# Altium PCB KeyboardMoudle.PcbDoc
Units mm, origin at the board's own origin, x right, y up, seen from the top; angles counter-clockwise.
Board outline 191 x 97 mm, 2 copper layers (Top Layer, Bottom Layer); 309 components, 178 nets, 843 pads, 193 vias.
Unrouted connection lines stored in the file: 648.
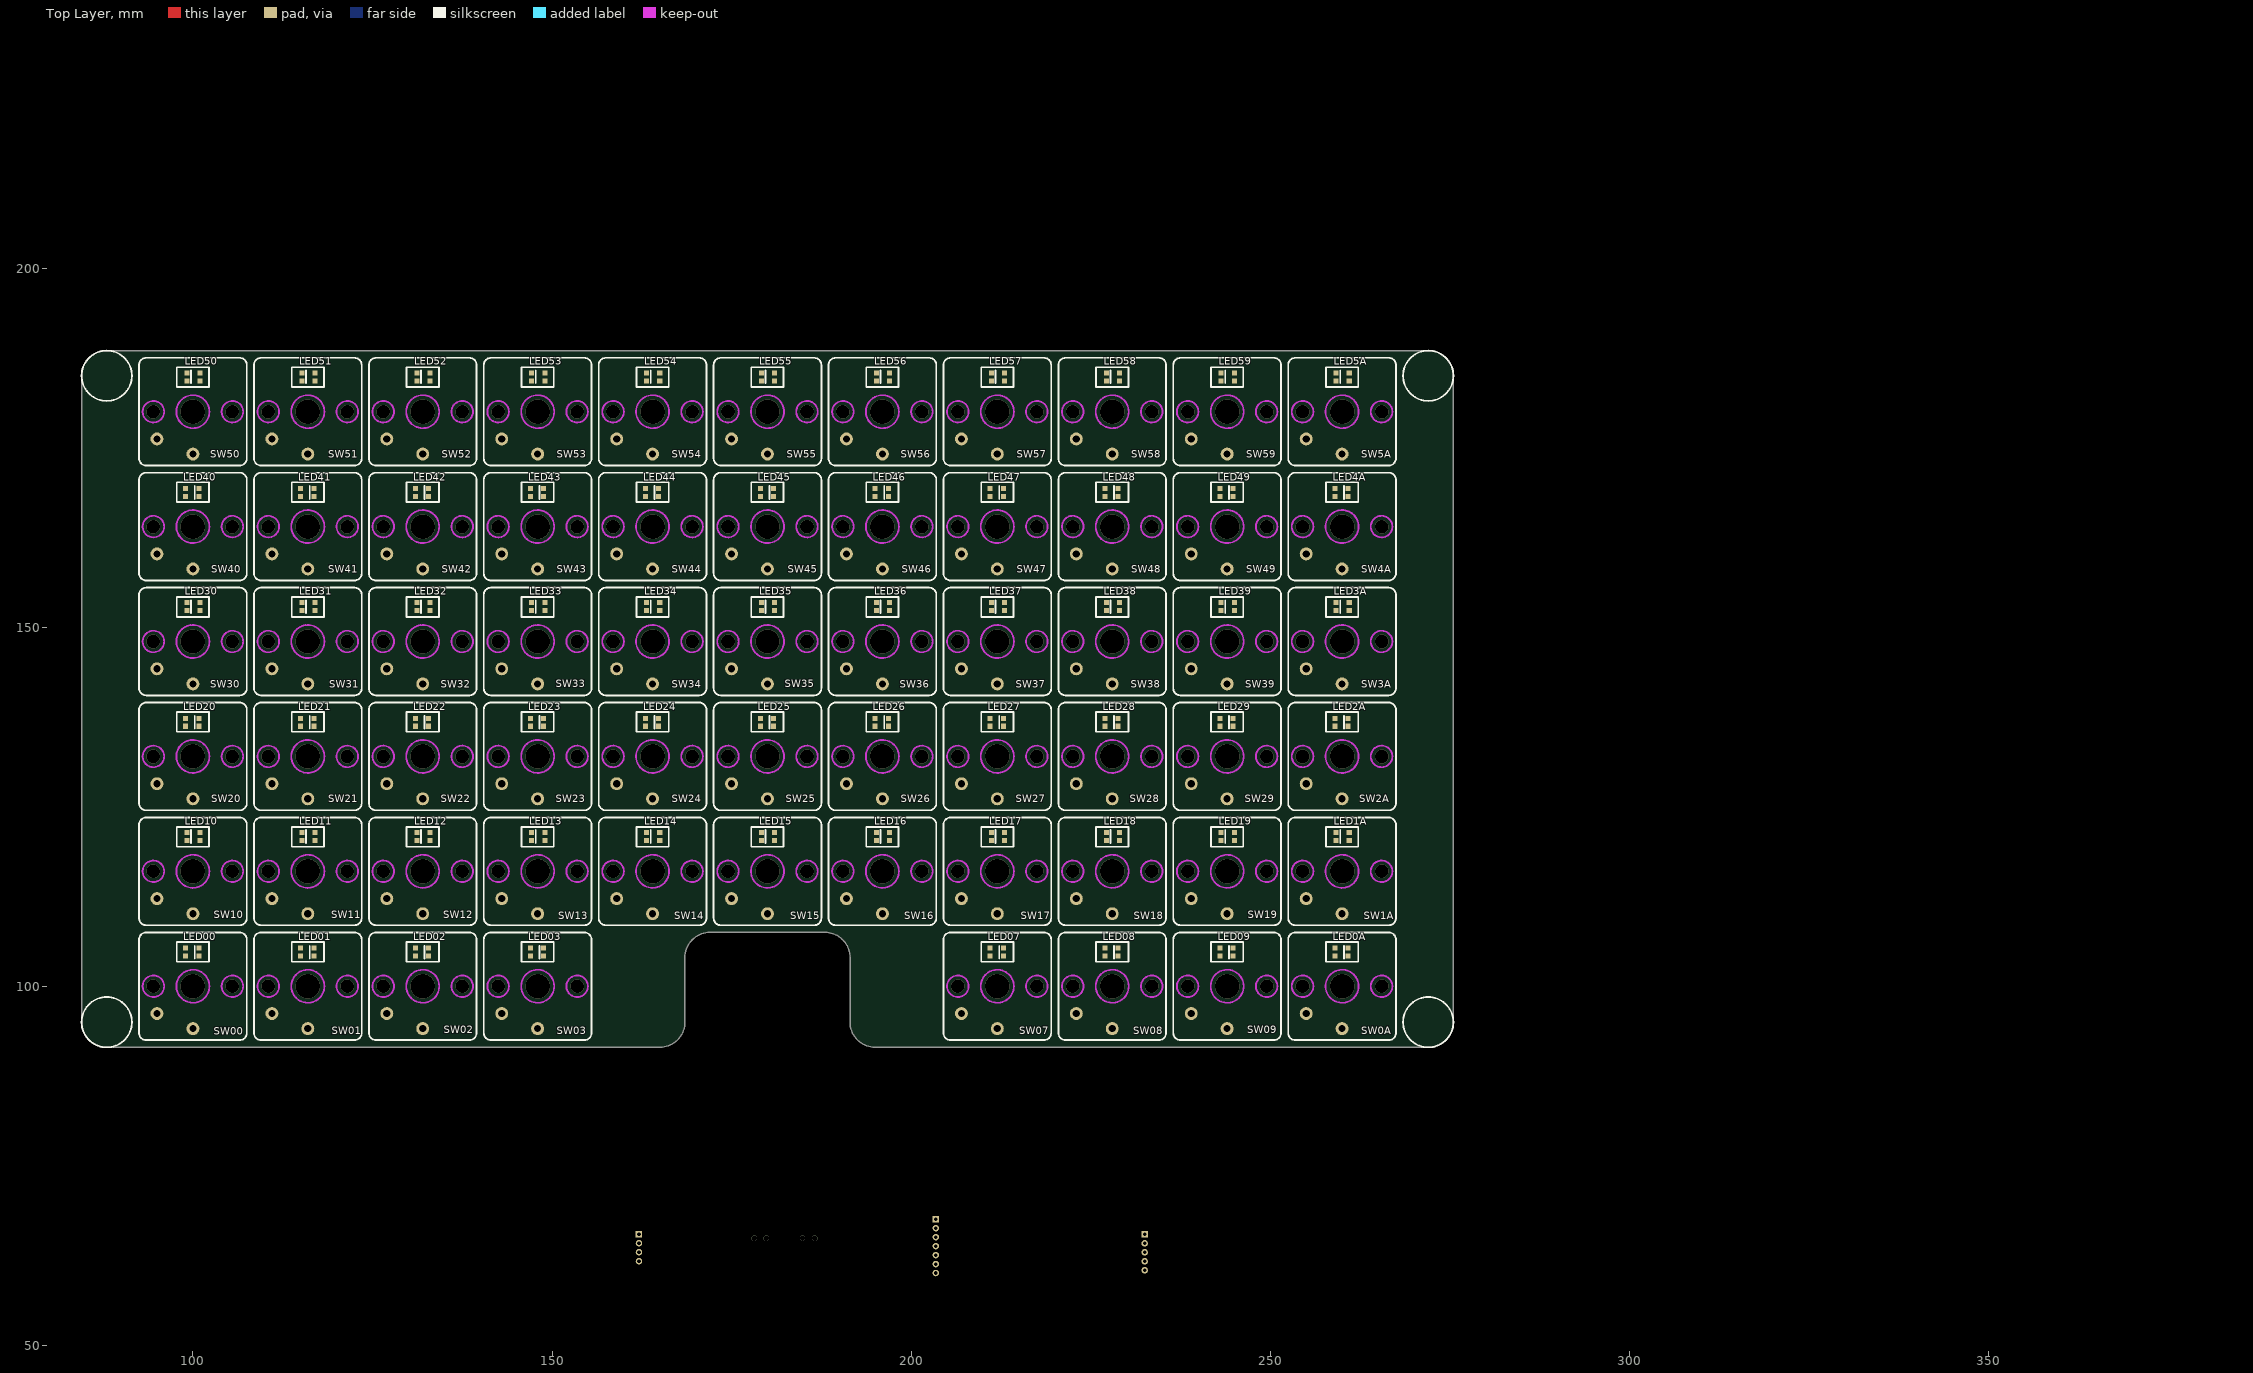
[diagram p0: Top Layer view]
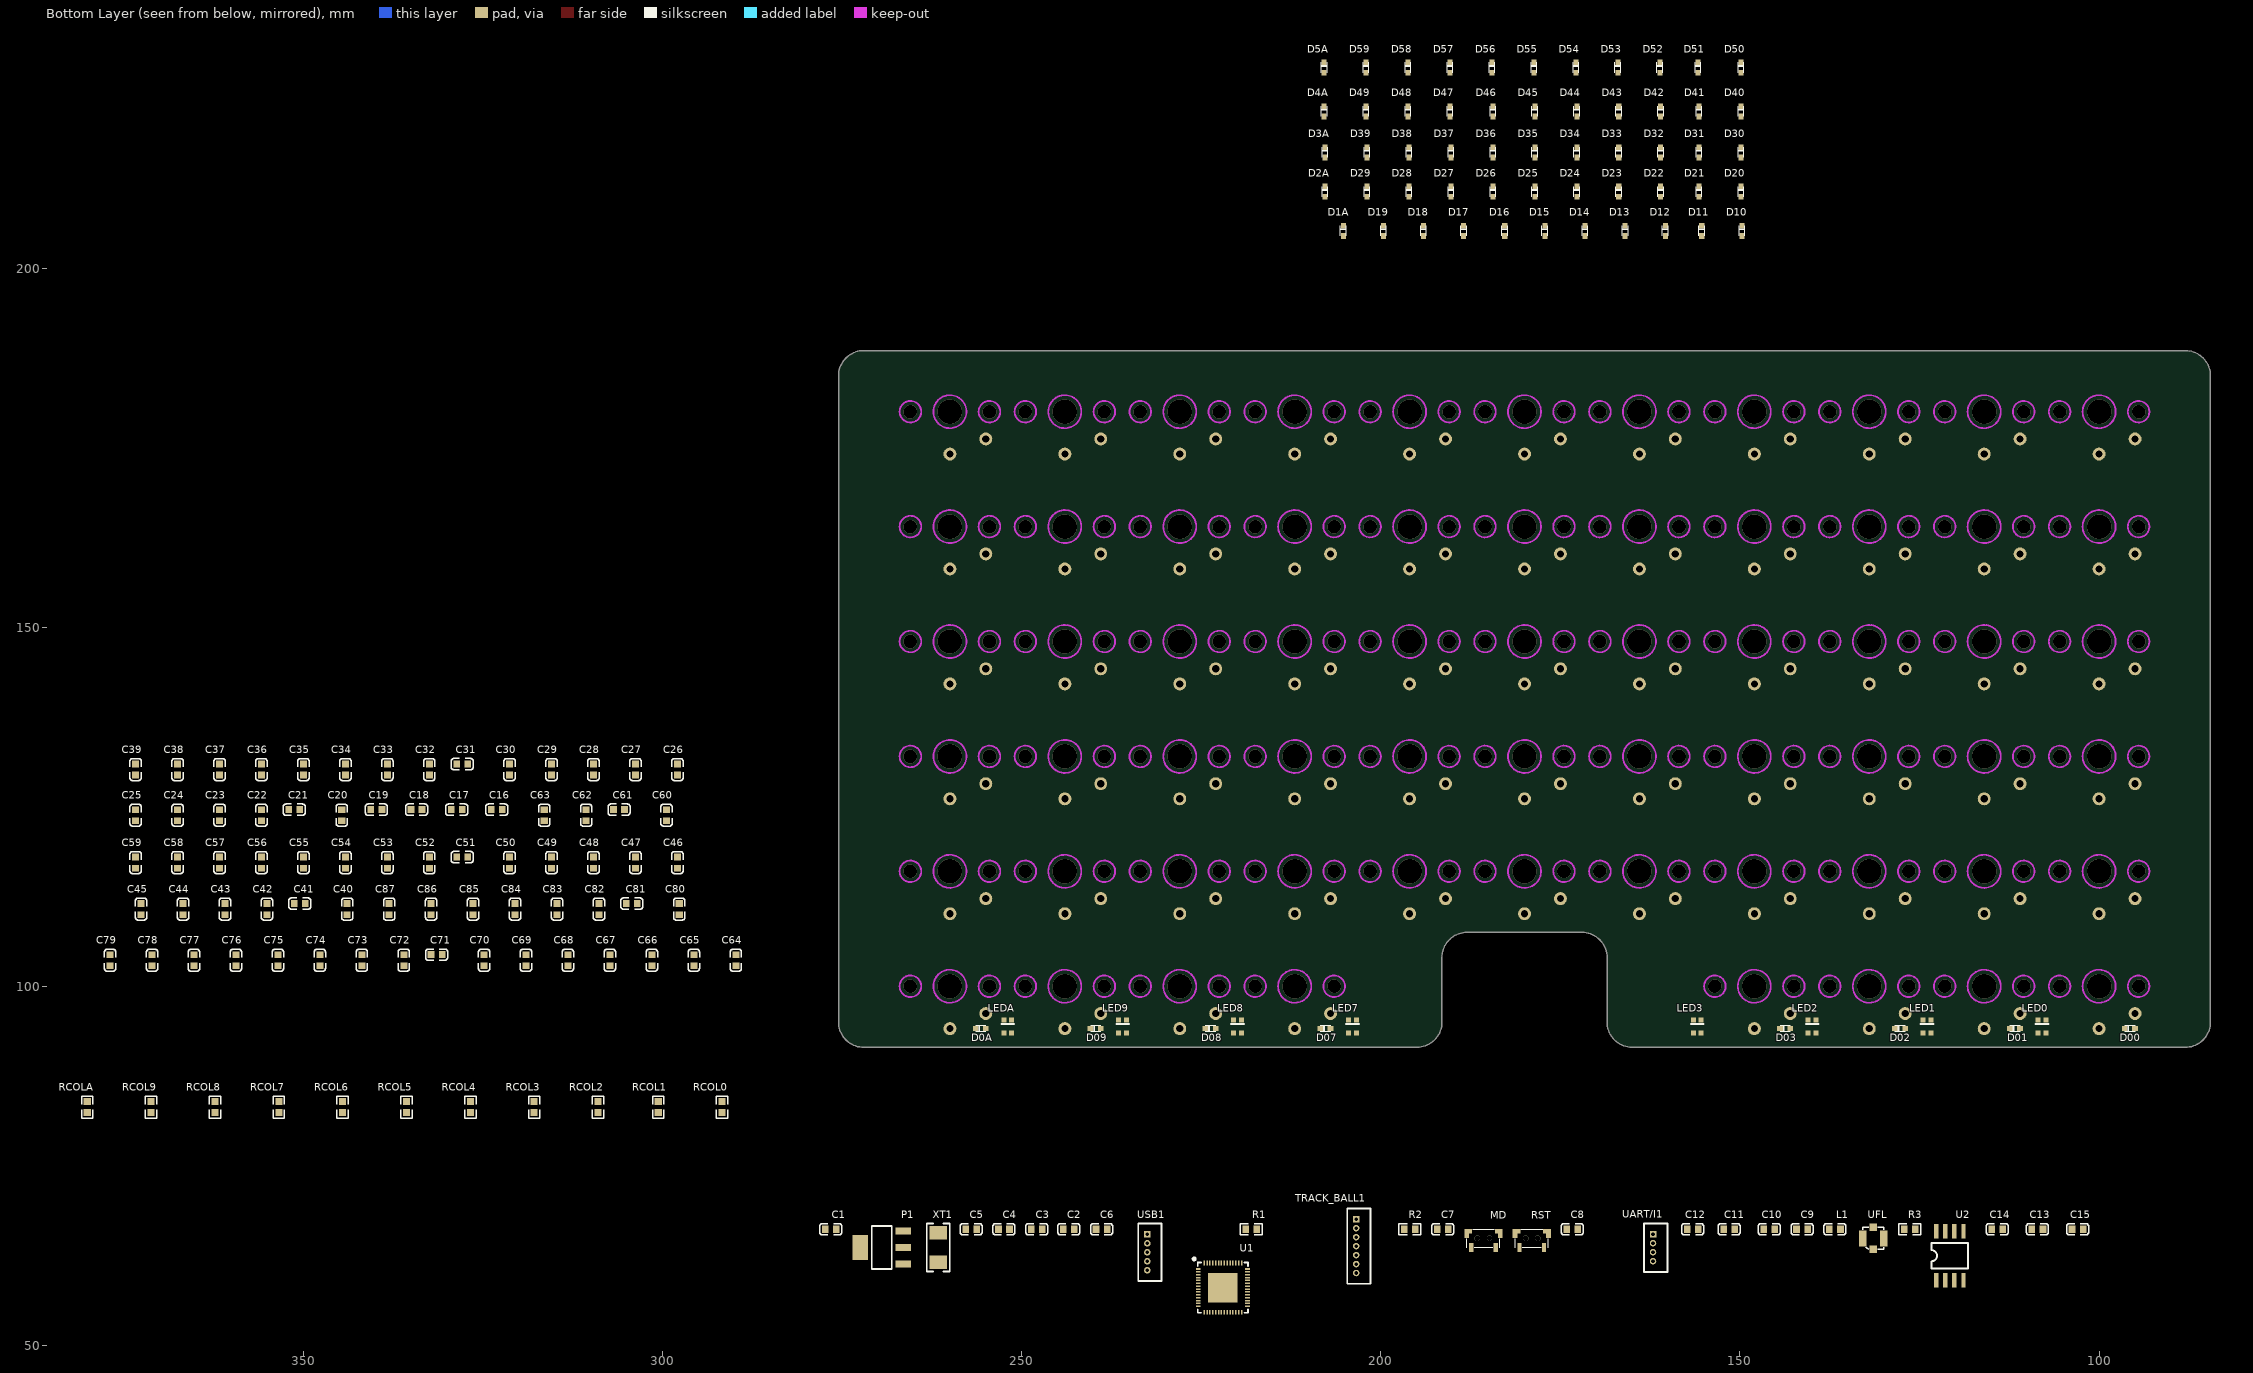
[diagram p1: Bottom Layer view, seen from below]

## Layer stack, top to bottom
Top Solder: solder mask 0.0102, Solder Resist, Dk 3.5
Top Layer: signal copper 0.0356
Dielectric 1: dielectric 0.32, FR-4, Dk 4.8
Bottom Layer: signal copper 0.0356
Bottom Solder: solder mask 0.0102, Solder Resist, Dk 3.5

## Board outline
88,91.5 165,91.5 ccw(c165,95) 168.5,95 168.5,104 cw(c172,104) 172,107.5 188,107.5 cw(c188,104) 191.5,104 191.5,95 ccw(c195,95) 195,91.5 272,91.5 ccw(c272,95) 275.5,95 275.5,185 ccw(c272,185) 272,188.5 268.5,188.5 88,188.5 ccw(c88,185) 84.5,185 84.5,95 ccw(c88,95)

## Design rules (kind name [scope] priority, off if disabled: settings)
Clearance [All] p1: gap=0.152 ignorepadtopadclearanceinfootprint=FALSE
HoleSize [All] p1: absolutevalues=TRUE maxlimit=7.62 minlimit=0.025 maxpercent=80.000 minpercent=20.000
MinimumSolderMaskSliver [All] p1: minsoldermaskwidth=0.152
PolygonConnect [All] p1: connectstyle=Relief reliefconductorwidth=0.254 reliefentries=4 polygonreliefangle="90 Angle" airgapwidth=0.254
RoutingVias [All] p1: holewidth=0.305 width=0.508 viastyle="Through Hole" minholewidth=0.305 minwidth=0.508 maxholewidth=4.572 maxwidth=4.572
SilkToSilkClearance [All] p1 off: silktosilkclearance=0.254
SilkToSolderMaskClearance [IsPad] p1 off: minsilkscreentomaskgap=0.254 clearancetoexposedcopper=TRUE
SolderMaskExpansion [All] p1: expansion=0.102 istentingtop=FALSE
Width [All] p1: maxlimit=1.27 minlimit=0.152 preferedwidth=0.254
26 further rules are at their usual default settings.

## Classes and differential pairs
component class KeyboardMoudle1: C1 C2 C3 C4 C5 C6 C7 C8 C9 C10 C11 C12 C13 C14 C15 FLT1 L1 MD P1 R1 R2 R3 RST TRACK_BALL1 U1 U2 UART/I1 UFL UFL1 USB1 XT1
component class KeyboardMoudle3: C16 C17 C18 C19 C20 C21 C22 C23 C24 C25 C26 C27 C28 C29 C30 C31 C32 C33 C34 C35 C36 C37 C38 C39 C40 C41 C42 C43 C44 C45 C46 C47 C48 C49 C50 C51 C52 C53 C54 C55 C56 C57 C58 C59 C60 C61 C62 C63 C64 C65 C66 C67 C68 C69 C70 C71 C72 C73 C74 C75 C76 C77 C78 C79 C80 C81 C82 C83 C84 C85 C86 C87 LED0 LED00 LED0A LED1 LED01 LED1A LED02 LED2 LED2A LED3 LED03 LED3A LED4A LED5A LED7 LED07 LED8 LED08 LED9 LED09 LED10 LED11 LED12 LED13 LED14 LED15 LED16 LED17 LED18 LED19 LED20 LED21 LED22 LED23 LED24 LED25 LED26 LED27 LED28 LED29 LED30 LED31 LED32 LED33 LED34 LED35 LED36 LED37 LED38 LED39 LED40 LED41 LED42 LED43 LED44 LED45 LED46 LED47 LED48 LED49 LED50 LED51 LED52 LED53 LED54 LED55 LED56 LED57 LED58 LED59 LEDA
component class KeyboardMoudle2: D00 D0A D01 D1A D02 D2A D03 D3A D4A D5A D07 D08 D09 D10 D11 D12 D13 D14 D15 D16 D17 D18 D19 D20 D21 D22 D23 D24 D25 D26 D27 D28 D29 D30 D31 D32 D33 D34 D35 D36 D37 D38 D39 D40 D41 D42 D43 D44 D45 D46 D47 D48 D49 D50 D51 D52 D53 D54 D55 D56 D57 D58 D59 RCOL0 RCOL1 RCOL2 RCOL3 RCOL4 RCOL5 RCOL6 RCOL7 RCOL8 RCOL9 RCOLA SW00 SW0A SW01 SW1A SW02 SW2A SW03 SW3A SW4A SW5A SW07 SW08 SW09 SW10 SW11 SW12 SW13 SW14 SW15 SW16 SW17 SW18 SW19 SW20 SW21 SW22 SW23 SW24 SW25 SW26 SW27 SW28 SW29 SW30 SW31 SW32 SW33 SW34 SW35 SW36 SW37 SW38 SW39 SW40 SW41 SW42 SW43 SW44 SW45 SW46 SW47 SW48 SW49 SW50 SW51 SW52 SW53 SW54 SW55 SW56 SW57 SW58 SW59

## Components (designator, comment, footprint, x,y, rotation, side; value= is the part's Value field where it differs from the comment)
C1 "22pF" 0603 276.606,66.167 r180 bottom
C2 "10uF" 0603 243.459,66.167 r180 bottom
C3 "104" 0603 247.904,66.167 r180 bottom
C4 "104" 0603 252.476,66.167 r180 bottom
C5 "10uF" 0603 257.048,66.167 r180 bottom
C6 "22pF" 0603 238.887,66.167 r180 bottom
C7 "1uF" 0603 191.389,66.167 r180 bottom
C8 "1uF" 0603 173.355,66.167 r180 bottom
C9 "104" 0603 141.351,66.167 r180 bottom
C10 "104" 0603 145.923,66.167 r180 bottom
C11 "104" 0603 151.511,66.167 r180 bottom
C12 "104" 0603 156.591,66.167 r180 bottom
C13 "3pF" 0603 108.585,66.167 r180 bottom
C14 "3pF" 0603 114.173,66.167 r180 bottom
C15 "104" 0603 102.997,66.167 r180 bottom
C16 "104" 0603 323.088,124.587 r180 bottom
C17 "104" 0603 328.676,124.587 r180 bottom
C18 "104" 0603 334.264,124.587 r180 bottom
C19 "104" 0603 339.852,124.587 r180 bottom
C20 "104" 0603 344.678,123.825 r90 bottom
C21 "104" 0603 351.282,124.587 r180 bottom
C22 "104" 0603 355.854,123.825 r90 bottom
C23 "104" 0603 361.696,123.825 r90 bottom
C24 "104" 0603 367.538,123.825 r90 bottom
C25 "104" 0603 373.38,123.825 r90 bottom
C26 "104" 0603 297.942,130.175 r90 bottom
C27 "104" 0603 303.784,130.175 r90 bottom
C28 "104" 0603 309.626,130.175 r90 bottom
C29 "104" 0603 315.468,130.175 r90 bottom
C30 "104" 0603 321.31,130.175 r90 bottom
C31 "104" 0603 327.914,130.937 r180 bottom
C32 "104" 0603 332.486,130.175 r90 bottom
C33 "104" 0603 338.328,130.175 r90 bottom
C34 "104" 0603 344.17,130.175 r90 bottom
C35 "104" 0603 350.012,130.175 r90 bottom
C36 "104" 0603 355.854,130.175 r90 bottom
C37 "104" 0603 361.696,130.175 r90 bottom
C38 "104" 0603 367.538,130.175 r90 bottom
C39 "104" 0603 373.38,130.175 r90 bottom
C40 "104" 0603 343.916,110.744 r90 bottom
C41 "104" 0603 350.52,111.506 r180 bottom
C42 "104" 0603 355.092,110.744 r90 bottom
C43 "104" 0603 360.934,110.744 r90 bottom
C44 "104" 0603 366.776,110.744 r90 bottom
C45 "104" 0603 372.618,110.744 r90 bottom
C46 "104" 0603 297.942,117.221 r90 bottom
C47 "104" 0603 303.784,117.221 r90 bottom
C48 "104" 0603 309.626,117.221 r90 bottom
C49 "104" 0603 315.468,117.221 r90 bottom
C50 "104" 0603 321.31,117.221 r90 bottom
C51 "104" 0603 327.914,117.983 r180 bottom
C52 "104" 0603 332.486,117.221 r90 bottom
C53 "104" 0603 338.328,117.221 r90 bottom
C54 "104" 0603 344.17,117.221 r90 bottom
C55 "104" 0603 350.012,117.221 r90 bottom
C56 "104" 0603 355.854,117.221 r90 bottom
C57 "104" 0603 361.696,117.221 r90 bottom
C58 "104" 0603 367.538,117.221 r90 bottom
C59 "104" 0603 373.38,117.221 r90 bottom
C60 "104" 0603 299.466,123.825 r90 bottom
C61 "104" 0603 306.07,124.587 r180 bottom
C62 "104" 0603 310.642,123.825 r90 bottom
C63 "104" 0603 316.484,123.825 r90 bottom
C64 "104" 0603 289.814,103.632 r90 bottom
C65 "104" 0603 295.656,103.632 r90 bottom
C66 "104" 0603 301.498,103.632 r90 bottom
C67 "104" 0603 307.34,103.632 r90 bottom
C68 "104" 0603 313.182,103.632 r90 bottom
C69 "104" 0603 319.024,103.632 r90 bottom
C70 "104" 0603 324.866,103.632 r90 bottom
C71 "104" 0603 331.47,104.394 r180 bottom
C72 "104" 0603 336.042,103.632 r90 bottom
C73 "104" 0603 341.884,103.632 r90 bottom
C74 "104" 0603 347.726,103.632 r90 bottom
C75 "104" 0603 353.568,103.632 r90 bottom
C76 "104" 0603 359.41,103.632 r90 bottom
C77 "104" 0603 365.252,103.632 r90 bottom
C78 "104" 0603 371.094,103.632 r90 bottom
C79 "104" 0603 376.936,103.632 r90 bottom
C80 "104" 0603 297.688,110.744 r90 bottom
C81 "104" 0603 304.292,111.506 r180 bottom
C82 "104" 0603 308.864,110.744 r90 bottom
C83 "104" 0603 314.706,110.744 r90 bottom
C84 "104" 0603 320.548,110.744 r90 bottom
C85 "104" 0603 326.39,110.744 r90 bottom
C86 "104" 0603 332.232,110.744 r90 bottom
C87 "104" 0603 338.074,110.744 r90 bottom
D00 "1N4148" SOD523 95,94.1 r0 bottom
D0A "1N4148" SOD523 255,94.1 r0 bottom
D01 "1N4148" SOD523 111,94.1 r0 bottom
D1A "1N4148" SOD523 205.232,204.47 r90 bottom
D02 "1N4148" SOD523 127,94.1 r0 bottom
D2A "1N4148" SOD523 207.772,209.931 r90 bottom
D03 "1N4148" SOD523 143,94.1 r0 bottom
D3A "1N4148" SOD523 207.772,215.392 r90 bottom
D4A "1N4148" SOD523 207.899,221.107 r90 bottom
D5A "1N4148" SOD523 207.899,227.203 r90 bottom
D07 "1N4148" SOD523 207,94.1 r0 bottom
D08 "1N4148" SOD523 223,94.1 r0 bottom
D09 "1N4148" SOD523 239,94.1 r0 bottom
D10 "1N4148" SOD523 149.733,204.47 r90 bottom
D11 "1N4148" SOD523 155.321,204.47 r90 bottom
D12 "1N4148" SOD523 160.401,204.47 r90 bottom
D13 "1N4148" SOD523 165.989,204.47 r90 bottom
D14 "1N4148" SOD523 171.577,204.47 r90 bottom
D15 "1N4148" SOD523 177.165,204.47 r90 bottom
D16 "1N4148" SOD523 182.753,204.47 r90 bottom
D17 "1N4148" SOD523 188.468,204.47 r90 bottom
D18 "1N4148" SOD523 194.056,204.47 r90 bottom
D19 "1N4148" SOD523 199.644,204.47 r90 bottom
D20 "1N4148" SOD523 149.86,209.931 r90 bottom
D21 "1N4148" SOD523 155.702,209.931 r90 bottom
D22 "1N4148" SOD523 161.036,209.931 r90 bottom
D23 "1N4148" SOD523 166.878,209.931 r90 bottom
D24 "1N4148" SOD523 172.72,209.931 r90 bottom
D25 "1N4148" SOD523 178.562,209.931 r90 bottom
D26 "1N4148" SOD523 184.404,209.931 r90 bottom
D27 "1N4148" SOD523 190.246,209.931 r90 bottom
D28 "1N4148" SOD523 196.088,209.931 r90 bottom
D29 "1N4148" SOD523 201.93,209.931 r90 bottom
D30 "1N4148" SOD523 149.86,215.392 r90 bottom
D31 "1N4148" SOD523 155.702,215.392 r90 bottom
D32 "1N4148" SOD523 161.036,215.392 r90 bottom
D33 "1N4148" SOD523 166.878,215.392 r90 bottom
D34 "1N4148" SOD523 172.72,215.392 r90 bottom
D35 "1N4148" SOD523 178.562,215.392 r90 bottom
D36 "1N4148" SOD523 184.404,215.392 r90 bottom
D37 "1N4148" SOD523 190.246,215.392 r90 bottom
D38 "1N4148" SOD523 196.088,215.392 r90 bottom
D39 "1N4148" SOD523 201.93,215.392 r90 bottom
D40 "1N4148" SOD523 149.86,221.107 r90 bottom
D41 "1N4148" SOD523 155.702,221.107 r90 bottom
D42 "1N4148" SOD523 161.036,221.107 r90 bottom
D43 "1N4148" SOD523 166.878,221.107 r90 bottom
D44 "1N4148" SOD523 172.72,221.107 r90 bottom
D45 "1N4148" SOD523 178.562,221.107 r90 bottom
D46 "1N4148" SOD523 184.404,221.107 r90 bottom
D47 "1N4148" SOD523 190.373,221.107 r90 bottom
D48 "1N4148" SOD523 196.215,221.107 r90 bottom
D49 "1N4148" SOD523 202.057,221.107 r90 bottom
D50 "" SOD523 149.86,227.203 r90 bottom
D51 "1N4148" SOD523 155.829,227.203 r90 bottom
D52 "1N4148" SOD523 161.163,227.203 r90 bottom
D53 "1N4148" SOD523 167.005,227.203 r90 bottom
D54 "1N4148" SOD523 172.847,227.203 r90 bottom
D55 "1N4148" SOD523 178.689,227.203 r90 bottom
D56 "1N4148" SOD523 184.531,227.203 r90 bottom
D57 "1N4148" SOD523 190.373,227.203 r90 bottom
D58 "1N4148" SOD523 196.215,227.203 r90 bottom
D59 "1N4148" SOD523 202.057,227.203 r90 bottom
L1 "2nH" 0603 136.779,66.167 r180 bottom
LED00 "WS2812" LED_WS2812_2020 99,105.3 r0 top locked
LED0 "WS2812" LED_WS2812_2020 108.5,93.5 r90 bottom locked
LED0A "WS2812" LED_WS2812_2020 259,105.3 r0 top locked
LED1 "WS2812" LED_WS2812_2020 124.5,93.5 r90 bottom locked
LED01 "WS2812" LED_WS2812_2020 115,105.3 r0 top locked
LED1A "WS2812" LED_WS2812_2020 261,120.3 r180 top locked
LED2 "WS2812" LED_WS2812_2020 140.5,93.5 r90 bottom locked
LED02 "WS2812" LED_WS2812_2020 131,105.3 r0 top locked
LED2A "WS2812" LED_WS2812_2020 259,137.3 r0 top locked
LED3 "WS2812" LED_WS2812_2020 156.5,93.5 r90 bottom locked
LED03 "WS2812" LED_WS2812_2020 147,105.3 r0 top locked
LED3A "WS2812" LED_WS2812_2020 261,152.3 r180 top locked
LED4A "WS2812" LED_WS2812_2020 259,169.3 r0 top locked
LED5A "WS2812" LED_WS2812_2020 261,184.3 r180 top locked
LED7 "WS2812" LED_WS2812_2020 204.5,93.5 r90 bottom locked
LED07 "WS2812" LED_WS2812_2020 211,105.3 r0 top locked
LED8 "WS2812" LED_WS2812_2020 220.5,93.5 r90 bottom locked
LED08 "WS2812" LED_WS2812_2020 227,105.3 r0 top locked
LED9 "WS2812" LED_WS2812_2020 236.5,93.5 r90 bottom locked
LED09 "WS2812" LED_WS2812_2020 243,105.3 r0 top locked
LED10 "WS2812" LED_WS2812_2020 101,120.3 r180 top locked
LED11 "WS2812" LED_WS2812_2020 117,120.3 r180 top locked
LED12 "WS2812" LED_WS2812_2020 133,120.3 r180 top locked
LED13 "WS2812" LED_WS2812_2020 149,120.3 r180 top locked
LED14 "WS2812" LED_WS2812_2020 165,120.3 r180 top locked
LED15 "WS2812" LED_WS2812_2020 181,120.3 r180 top locked
LED16 "WS2812" LED_WS2812_2020 197,120.3 r180 top locked
LED17 "WS2812" LED_WS2812_2020 213,120.3 r180 top locked
LED18 "WS2812" LED_WS2812_2020 229,120.3 r180 top locked
LED19 "WS2812" LED_WS2812_2020 245,120.3 r180 top locked
LED20 "WS2812" LED_WS2812_2020 99,137.3 r0 top locked
LED21 "WS2812" LED_WS2812_2020 115,137.3 r0 top locked
LED22 "WS2812" LED_WS2812_2020 131,137.3 r0 top locked
LED23 "WS2812" LED_WS2812_2020 147,137.3 r0 top locked
LED24 "WS2812" LED_WS2812_2020 163,137.3 r0 top locked
LED25 "WS2812" LED_WS2812_2020 179,137.3 r0 top locked
LED26 "WS2812" LED_WS2812_2020 195,137.3 r0 top locked
LED27 "WS2812" LED_WS2812_2020 211,137.3 r0 top locked
LED28 "WS2812" LED_WS2812_2020 227,137.3 r0 top locked
LED29 "WS2812" LED_WS2812_2020 243,137.3 r0 top locked
LED30 "WS2812" LED_WS2812_2020 101,152.3 r180 top locked
LED31 "WS2812" LED_WS2812_2020 117,152.3 r180 top locked
LED32 "WS2812" LED_WS2812_2020 133,152.3 r180 top locked
LED33 "WS2812" LED_WS2812_2020 149,152.3 r180 top locked
LED34 "WS2812" LED_WS2812_2020 165,152.3 r180 top locked
LED35 "WS2812" LED_WS2812_2020 181,152.3 r180 top locked
LED36 "WS2812" LED_WS2812_2020 197,152.3 r180 top locked
LED37 "WS2812" LED_WS2812_2020 213,152.3 r180 top locked
LED38 "WS2812" LED_WS2812_2020 229,152.3 r180 top locked
LED39 "WS2812" LED_WS2812_2020 245,152.3 r180 top locked
LED40 "WS2812" LED_WS2812_2020 99,169.3 r0 top locked
LED41 "WS2812" LED_WS2812_2020 115,169.3 r0 top locked
LED42 "WS2812" LED_WS2812_2020 131,169.3 r0 top locked
LED43 "WS2812" LED_WS2812_2020 147,169.3 r0 top locked
LED44 "WS2812" LED_WS2812_2020 163,169.3 r0 top locked
LED45 "WS2812" LED_WS2812_2020 179,169.3 r0 top locked
LED46 "WS2812" LED_WS2812_2020 195,169.3 r0 top locked
LED47 "WS2812" LED_WS2812_2020 211,169.3 r0 top locked
LED48 "WS2812" LED_WS2812_2020 227,169.3 r0 top locked
LED49 "WS2812" LED_WS2812_2020 243,169.3 r0 top locked
LED50 "WS2812" LED_WS2812_2020 101,184.3 r180 top locked
LED51 "WS2812" LED_WS2812_2020 117,184.3 r180 top locked
LED52 "WS2812" LED_WS2812_2020 133,184.3 r180 top locked
LED53 "WS2812" LED_WS2812_2020 149,184.3 r180 top locked
LED54 "WS2812" LED_WS2812_2020 165,184.3 r180 top locked
LED55 "WS2812" LED_WS2812_2020 181,184.3 r180 top locked
LED56 "WS2812" LED_WS2812_2020 197,184.3 r180 top locked
LED57 "WS2812" LED_WS2812_2020 213,184.3 r180 top locked
LED58 "WS2812" LED_WS2812_2020 229,184.3 r180 top locked
LED59 "WS2812" LED_WS2812_2020 245,184.3 r180 top locked
LEDA "WS2812" LED_WS2812_2020 252.5,93.5 r90 bottom locked
MD "KEY" KEY_SMT_4_L 187.423,63.627 r180 bottom
P1 "3V3" SOT223 269.494,63.627 r180 bottom
R1 "10K" R_0603 218.059,66.167 r180 bottom
R2 "10K" R_0603 195.961,66.167 r180 bottom
R3 "0R" R_0603 126.365,66.167 r180 bottom
RCOL0 "100K" R_0603 291.719,83.185 r90 bottom
RCOL1 "100K" R_0603 300.609,83.185 r90 bottom
RCOL2 "100K" R_0603 308.991,83.185 r90 bottom
RCOL3 "100K" R_0603 317.881,83.185 r90 bottom
RCOL4 "100K" R_0603 326.771,83.185 r90 bottom
RCOL5 "100K" R_0603 335.661,83.185 r90 bottom
RCOL6 "100K" R_0603 344.551,83.185 r90 bottom
RCOL7 "100K" R_0603 353.441,83.185 r90 bottom
RCOL8 "100K" R_0603 362.331,83.185 r90 bottom
RCOL9 "100K" R_0603 371.221,83.185 r90 bottom
RCOLA "100K" R_0603 380.111,83.185 r90 bottom
RST "KEY" KEY_SMT_4_L 180.692,63.627 r180 bottom
SW00 "SWITCH_KAILH_1350" SWITCH_KAILH_1350 100,100 r0 top locked
SW0A "SWITCH_KAILH_1350" SWITCH_KAILH_1350 260,100 r0 top locked
SW01 "SWITCH_KAILH_1350" SWITCH_KAILH_1350 116,100 r0 top locked
SW1A "SWITCH_KAILH_1350" SWITCH_KAILH_1350 260,116 r0 top locked
SW02 "SWITCH_KAILH_1350" SWITCH_KAILH_1350 132,100 r0 top locked
SW2A "SWITCH_KAILH_1350" SWITCH_KAILH_1350 260,132 r0 top locked
SW03 "SWITCH_KAILH_1350" SWITCH_KAILH_1350 148,100 r0 top locked
SW3A "SWITCH_KAILH_1350" SWITCH_KAILH_1350 260,148 r0 top locked
SW4A "SWITCH_KAILH_1350" SWITCH_KAILH_1350 260,164 r0 top locked
SW5A "SWITCH_KAILH_1350" SWITCH_KAILH_1350 260,180 r0 top locked
SW07 "SWITCH_KAILH_1350" SWITCH_KAILH_1350 212,100 r0 top locked
SW08 "SWITCH_KAILH_1350" SWITCH_KAILH_1350 228,100 r0 top locked
SW09 "SWITCH_KAILH_1350" SWITCH_KAILH_1350 244,100 r0 top locked
SW10 "SWITCH_KAILH_1350" SWITCH_KAILH_1350 100,116 r0 top locked
SW11 "SWITCH_KAILH_1350" SWITCH_KAILH_1350 116,116 r0 top locked
SW12 "SWITCH_KAILH_1350" SWITCH_KAILH_1350 132,116 r0 top locked
SW13 "SWITCH_KAILH_1350" SWITCH_KAILH_1350 148,116 r0 top locked
SW14 "SWITCH_KAILH_1350" SWITCH_KAILH_1350 164,116 r0 top locked
SW15 "SWITCH_KAILH_1350" SWITCH_KAILH_1350 180,116 r0 top locked
SW16 "SWITCH_KAILH_1350" SWITCH_KAILH_1350 196,116 r0 top locked
SW17 "SWITCH_KAILH_1350" SWITCH_KAILH_1350 212,116 r0 top locked
SW18 "SWITCH_KAILH_1350" SWITCH_KAILH_1350 228,116 r0 top locked
SW19 "SWITCH_KAILH_1350" SWITCH_KAILH_1350 244,116 r0 top locked
SW20 "SWITCH_KAILH_1350" SWITCH_KAILH_1350 100,132 r0 top locked
SW21 "SWITCH_KAILH_1350" SWITCH_KAILH_1350 116,132 r0 top locked
SW22 "SWITCH_KAILH_1350" SWITCH_KAILH_1350 132,132 r0 top locked
SW23 "SWITCH_KAILH_1350" SWITCH_KAILH_1350 148,132 r0 top locked
SW24 "SWITCH_KAILH_1350" SWITCH_KAILH_1350 164,132 r0 top locked
SW25 "SWITCH_KAILH_1350" SWITCH_KAILH_1350 180,132 r0 top locked
SW26 "SWITCH_KAILH_1350" SWITCH_KAILH_1350 196,132 r0 top locked
SW27 "SWITCH_KAILH_1350" SWITCH_KAILH_1350 212,132 r0 top locked
SW28 "SWITCH_KAILH_1350" SWITCH_KAILH_1350 228,132 r0 top locked
SW29 "SWITCH_KAILH_1350" SWITCH_KAILH_1350 244,132 r0 top locked
SW30 "SWITCH_KAILH_1350" SWITCH_KAILH_1350 100,148 r0 top locked
SW31 "SWITCH_KAILH_1350" SWITCH_KAILH_1350 116,148 r0 top locked
SW32 "SWITCH_KAILH_1350" SWITCH_KAILH_1350 132,148 r0 top locked
SW33 "SWITCH_KAILH_1350" SWITCH_KAILH_1350 148,148 r0 top locked
SW34 "SWITCH_KAILH_1350" SWITCH_KAILH_1350 164,148 r0 top locked
SW35 "SWITCH_KAILH_1350" SWITCH_KAILH_1350 180,148 r0 top locked
SW36 "SWITCH_KAILH_1350" SWITCH_KAILH_1350 196,148 r0 top locked
SW37 "SWITCH_KAILH_1350" SWITCH_KAILH_1350 212,148 r0 top locked
SW38 "SWITCH_KAILH_1350" SWITCH_KAILH_1350 228,148 r0 top locked
SW39 "SWITCH_KAILH_1350" SWITCH_KAILH_1350 244,148 r0 top locked
SW40 "SWITCH_KAILH_1350" SWITCH_KAILH_1350 100,164 r0 top locked
SW41 "SWITCH_KAILH_1350" SWITCH_KAILH_1350 116,164 r0 top locked
SW42 "SWITCH_KAILH_1350" SWITCH_KAILH_1350 132,164 r0 top locked
SW43 "SWITCH_KAILH_1350" SWITCH_KAILH_1350 148,164 r0 top locked
SW44 "SWITCH_KAILH_1350" SWITCH_KAILH_1350 164,164 r0 top locked
SW45 "SWITCH_KAILH_1350" SWITCH_KAILH_1350 180,164 r0 top locked
SW46 "SWITCH_KAILH_1350" SWITCH_KAILH_1350 196,164 r0 top locked
SW47 "SWITCH_KAILH_1350" SWITCH_KAILH_1350 212,164 r0 top locked
SW48 "SWITCH_KAILH_1350" SWITCH_KAILH_1350 228,164 r0 top locked
SW49 "SWITCH_KAILH_1350" SWITCH_KAILH_1350 244,164 r0 top locked
SW50 "SWITCH_KAILH_1350" SWITCH_KAILH_1350 100,180 r0 top locked
SW51 "SWITCH_KAILH_1350" SWITCH_KAILH_1350 116,180 r0 top locked
SW52 "SWITCH_KAILH_1350" SWITCH_KAILH_1350 132,180 r0 top locked
SW53 "SWITCH_KAILH_1350" SWITCH_KAILH_1350 148,180 r0 top locked
SW54 "SWITCH_KAILH_1350" SWITCH_KAILH_1350 164,180 r0 top locked
SW55 "SWITCH_KAILH_1350" SWITCH_KAILH_1350 180,180 r0 top locked
SW56 "SWITCH_KAILH_1350" SWITCH_KAILH_1350 196,180 r0 top locked
SW57 "SWITCH_KAILH_1350" SWITCH_KAILH_1350 212,180 r0 top locked
SW58 "SWITCH_KAILH_1350" SWITCH_KAILH_1350 228,180 r0 top locked
SW59 "SWITCH_KAILH_1350" SWITCH_KAILH_1350 244,180 r0 top locked
TRACK_BALL1 "SH1.25mm_7P" SH1.25MM_7P 203.442,60.071 r90 bottom
U1 "ESP32_S3R8" QFN56 221.996,58.039 r180 bottom
U2 "W25Q128" SOIC8-208MIL 122.684,59.055 r90 bottom
UART/I1 "SH1.25mm_4P" SH1.25MM_4P 162.105,61.722 r90 bottom
UFL "UFL" IPEX 131.445,64.897 r180 bottom
USB1 "SH1.25mm_5P" SH1.25MM_5P 232.525,60.452 r90 bottom
XT1 "40MHz" XTAL_5032 261.62,63.627 r90 bottom

## Footprints (in the part's own frame and the unit in brackets; to place one, negate y for a bottom-side part, rotate by r counter-clockwise, add the part's x,y. Pads: shape width x height; smd on the part's side, far side on the other; paste and mask are expansions set on the pad)
0603 [mm]
  rect 0.93x0.98 smd: 1(-0.77,0) 2(0.77,0)
  silkscreen extent -1.53,-0.79 1.54,0.79, body extent -0.8,-0.4 0.8,0.4, height 0.3
IPEX [mm]
  rect 1x1.05 smd: 1(0,1.525) 3(0,-1.525)
  rect 1.05x2.2 smd: 2(-1.475,0) 2(1.475,0)
  silkscreen extent -1.48,-1.53 1.48,1.53, body extent -1.5,-1.55 1.5,1.55, height 1.25
KEY_SMT_4_L [mm]
  rect 0.65x1.3 smd: 0(-0.625,1.95) 0(4.025,1.95)
  rect 0.4x0.65 smd: 0(-0.1,2.275) 0(3.5,2.275)
  rect 0.6x1.2 smd: 1(0,0) 2(3.4,0)
  silkscreen extent -0.6,0 4,2.5, body extent -0.66,-0.26 4.04,3.39, height 1.9
LED_WS2812_2020 [mm]
  rect 0.7x0.7 smd: 1(1.83,-1.1) 2(1.83,0) 3(0,0) 4(0,-1.1)
  silkscreen extent 1.26,-1.45 1.26,0.35, body extent -0.18,-1.55 2.02,0.45, height 0.84
QFN56 [mm]
  rect 0.65x0.22 smd: 1(-3.425,2.6) 2(-3.425,2.2) 3(-3.425,1.8) 4(-3.425,1.4) 5(-3.425,1) 6(-3.425,0.6) 7(-3.425,0.2) 8(-3.425,-0.2) 9(-3.425,-0.6) 10(-3.425,-1) 11(-3.425,-1.4) 12(-3.425,-1.8) 13(-3.425,-2.2) 14(-3.425,-2.6) 29(3.425,-2.6) 30(3.425,-2.2) 31(3.425,-1.8) 32(3.425,-1.4) 33(3.425,-1) 34(3.425,-0.6) 35(3.425,-0.2) 36(3.425,0.2) 37(3.425,0.6) 38(3.425,1) 39(3.425,1.4) 40(3.425,1.8) 41(3.425,2.2) 42(3.425,2.6)
  rect 0.22x0.65 smd: 15(-2.6,-3.425) 16(-2.2,-3.425) 17(-1.8,-3.425) 18(-1.4,-3.425) 19(-1,-3.425) 20(-0.6,-3.425) 21(-0.2,-3.425) 22(0.2,-3.425) 23(0.6,-3.425) 24(1,-3.425) 25(1.4,-3.425) 26(1.8,-3.425) 27(2.2,-3.425) 28(2.6,-3.425) 43(2.6,3.425) 44(2.2,3.425) 45(1.8,3.425) 46(1.4,3.425) 47(1,3.425) 48(0.6,3.425) 49(0.2,3.425) 50(-0.2,3.425) 51(-0.6,3.425) 52(-1,3.425) 53(-1.4,3.425) 54(-1.8,3.425) 55(-2.2,3.425) 56(-2.6,3.425)
  rect 4.1x4.1 smd: 57(0,0)
  silkscreen extent -4.16,-3.5 3.5,4.16, body extent -3.5,-3.5 3.5,3.5, height 0.25
R_0603 [mm]
  rect 0.93x0.98 smd: 1(-0.77,0) 2(0.77,0)
  silkscreen extent -1.53,-0.79 1.54,0.79, body extent -0.85,-0.4 0.85,0.4, height 0.56
SH1.25MM_4P [mm]
  rect 0.9x0.9 hole 0.5: 1(3.75,0)
  round 0.9 hole 0.5: 2(2.5,0) 3(1.25,0) 4(0,0)
  silkscreen extent -1.5,-2 5.25,1.25, body extent -1.5,-1.91 5.25,1.41, height 4.22
SH1.25MM_5P [mm]
  rect 0.9x0.9 hole 0.5: 1(5,0)
  round 0.9 hole 0.5: 2(3.75,0) 3(2.5,0) 4(1.25,0) 5(0,0)
  silkscreen extent -1.5,-2 6.5,1.25, body extent -1.5,-1.95 6.5,1.25, height 4.7
SH1.25MM_7P [mm]
  rect 0.9x0.9 hole 0.5: 1(7.5,0)
  round 0.9 hole 0.5: 2(6.25,0) 3(5,0) 4(3.75,0) 5(2.5,0) 6(1.25,0) 7(0,0)
  silkscreen extent -1.5,-2 9,1.25, body extent -1.5,-1.95 9,1.25, height 4.7
SOD523 [mm]
  rect 0.8x0.7 smd: 1(0,0) 2(1.42,0)
  silkscreen extent 0,-0.4 1.42,0.4
SOIC8-208MIL [mil]
  rect 80x24 smd: 1(0,0) 2(0,-50.06) 3(0,-100.06) 4(0,-150.06) 5(270,-150) 6(270,-100) 7(270,-50) 8(270,0)
  silkscreen extent 65,-175 205,25
SOT223 [mm]
  rect 2.2x1 smd: 1(3,-2.3) 2(3,0) 3(3,2.3)
  rect 2.2x3.5 smd: 2(-3,0)
  silkscreen extent -1.4,-3 1.4,3, body extent -3.49,-3.24 3.49,3.24, height 1.64
SWITCH_KAILH_1350 [mm]
  round 1.8 hole 1: 1(0,-5.9) 2(-5,-3.8)
  Top Layer keep-out circle w0.254: c5.5,0 r1.5
  Top Layer keep-out circle w0.254: c0,0 r2.3
  Top Layer keep-out circle w0.254: c-5.5,0 r1.5
  Bottom Layer keep-out circle w0.254: c0,0 r2.3
  Bottom Layer keep-out circle w0.254: c5.5,0 r1.5
  Bottom Layer keep-out circle w0.254: c-5.5,0 r1.5
  silkscreen extent -7.5,-7.5 7.5,7.5, body extent -7.5,-7.5 7.5,7.5, height 8
XTAL_5032 [mm]
  rect 1.9x2.4 smd: 1(-2.05,0) 2(2.05,0)
  silkscreen extent -3.32,-1.6 3.32,1.6, body extent -2.5,-1.6 2.5,1.6, height 1.2

## Part data
C1 C2 C3 C4 C5 C6 C7 C8 C9 C10 C11 C12 C13 C14 C15 C16 C17 C18 C19 C20 C21 C22 C23 C24 C25 C26 C27 C28 C29 C30 C31 C32 C33 C34 C35 C36 C37 C38 C39 C40 C41 C42 C43 C44 C45 C46 C47 C48 C49 C50 C51 C52 C53 C54 C55 C56 C57 C58 C59 C60 C61 C62 C63 C64 C65 C66 C67 C68 C69 C70 C71 C72 C73 C74 C75 C76 C77 C78 C79 C80 C81 C82 C83 C84 C85 C86 C87: library part CAP_0603, "贴片电容 0603"
D00 D0A D01 D1A D02 D2A D03 D3A D4A D5A D07 D08 D09 D10 D11 D12 D13 D14 D15 D16 D17 D18 D19 D20 D21 D22 D23 D24 D25 D26 D27 D28 D29 D30 D31 D32 D33 D34 D35 D36 D37 D38 D39 D40 D41 D42 D43 D44 D45 D46 D47 D48 D49 D50 D51 D52 D53 D54 D55 D56 D57 D58 D59: library part DIO_1N4148_SOD523, "开关二极管"
L1: library part L_0603, "电感 0603"
LED00 LED0 LED0A LED1 LED01 LED1A LED2 LED02 LED2A LED3 LED03 LED3A LED4A LED5A LED7 LED07 LED8 LED08 LED9 LED09 LED10 LED11 LED12 LED13 LED14 LED15 LED16 LED17 LED18 LED19 LED20 LED21 LED22 LED23 LED24 LED25 LED26 LED27 LED28 LED29 LED30 LED31 LED32 LED33 LED34 LED35 LED36 LED37 LED38 LED39 LED40 LED41 LED42 LED43 LED44 LED45 LED46 LED47 LED48 LED49 LED50 LED51 LED52 LED53 LED54 LED55 LED56 LED57 LED58 LED59 LEDA: library part LED_WS2812_2020, "WS2812 LED"
MD RST: library part KEY_SMT_4_L, "卧式贴片按键 2*4*3.5mm"
P1: library part LDO_AMS1117, "线性稳压器"
R1 R2 R3 RCOL0 RCOL1 RCOL2 RCOL3 RCOL4 RCOL5 RCOL6 RCOL7 RCOL8 RCOL9 RCOLA: library part RES_0603, "电阻 0603"
SW00 SW0A SW01 SW1A SW02 SW2A SW03 SW3A SW4A SW5A SW07 SW08 SW09 SW10 SW11 SW12 SW13 SW14 SW15 SW16 SW17 SW18 SW19 SW20 SW21 SW22 SW23 SW24 SW25 SW26 SW27 SW28 SW29 SW30 SW31 SW32 SW33 SW34 SW35 SW36 SW37 SW38 SW39 SW40 SW41 SW42 SW43 SW44 SW45 SW46 SW47 SW48 SW49 SW50 SW51 SW52 SW53 SW54 SW55 SW56 SW57 SW58 SW59: "凯华机械矮轴1350"
U1: library part ESP32_S3, "ESP32"
U2: library part W25Q64, "FLASH"
UFL: "射频接口"
XT1: library part XTAL_5032, "贴片无源晶振"

## Via types
v1: diameter 1.9, hole 1.9, Top Layer to Bottom Layer, 126 vias
v2: diameter 3.4, hole 3.4, Top Layer to Bottom Layer, 63 vias
v3: diameter 0.75, hole 0.75, Top Layer to Bottom Layer, 4 vias

## Nets (pads, with @x,y where several pads share a name; then routed paths per layer and width w, separated by ;. In a path a pad name is that pad's centre, name@x,y a point inside that pad or via, vN(x,y) a via of type N, cw(c..) or ccw(c..) an arc to the next point about the centre after c; other vN are vias at no path point)
3V3: C4.2 C5.2 C9.2 C10.2 C11.2 C12.2 P1.2 R1.1 R2.1 TRACK_BALL1.1 U1.2 U1.3 U1.20 U1.46 U1.55 U1.56
5V: C2.2 C3.2 C16.2 C17.2 C18.2 C19.2 C20.2 C21.2 C22.2 C23.2 C24.2 C25.2 C26.2 C27.2 C28.2 C29.2 C30.2 C31.2 C32.2 C33.2 C34.2 C35.2 C36.2 C37.2 C38.2 C39.2 C40.2 C41.2 C42.2 C43.2 C44.2 C45.2 C46.2 C47.2 C48.2 C49.2 C50.2 C51.2 C52.2 C53.2 C54.2 C55.2 C56.2 C57.2 C58.2 C59.2 C60.2 C61.2 C62.2 C63.2 C64.2 C65.2 C66.2 C67.2 C68.2 C69.2 C70.2 C71.2 C72.2 C73.2 C74.2 C75.2 C76.2 C77.2 C78.2 C79.2 C80.2 C81.2 C82.2 C83.2 C84.2 C85.2 C86.2 C87.2 LED00.4 LED0.4 LED0A.4 LED01.4 LED1.4 LED1A.4 LED2.4 LED02.4 LED2A.4 LED3.4 LED03.4 LED3A.4 LED4A.4 LED5A.4 LED7.4 LED07.4 LED08.4 LED8.4 LED09.4 LED9.4 LED10.4 LED11.4 LED12.4 LED13.4 LED14.4 LED15.4 LED16.4 LED17.4 LED18.4 LED19.4 LED20.4 LED21.4 LED22.4 LED23.4 LED24.4 LED25.4 LED26.4 LED27.4 LED28.4 LED29.4 LED30.4 LED31.4 LED32.4 LED33.4 LED34.4 LED35.4 LED36.4 LED37.4 LED38.4 LED39.4 LED40.4 LED41.4 LED42.4 LED43.4 LED44.4 LED45.4 LED46.4 LED47.4 LED48.4 LED49.4 LED50.4 LED51.4 LED52.4 LED53.4 LED54.4 LED55.4 LED56.4 LED57.4 LED58.4 LED59.4 LEDA.4 P1.3 UART/I1.1 USB1.1
BAT_ADC: U1.9 USB1.4
COL0: D00.2 D10.2 D20.2 D30.2 D40.2 D50.2 RCOL0.2 U1.14
COL1: D01.2 D11.2 D21.2 D31.2 D41.2 D51.2 RCOL1.2 U1.21
COL2: D02.2 D12.2 D22.2 D32.2 D42.2 D52.2 RCOL2.2 U1.22
COL3: D03.2 D13.2 D23.2 D33.2 D43.2 D53.2 RCOL3.2 U1.23
COL4: D14.2 D24.2 D34.2 D44.2 D54.2 RCOL4.2 U1.24
COL5: D15.2 D25.2 D35.2 D45.2 D55.2 RCOL5.2 U1.27
COL6: D16.2 D26.2 D36.2 D46.2 D56.2 RCOL6.2 U1.43
COL7: D07.2 D17.2 D27.2 D37.2 D47.2 D57.2 RCOL7.2 U1.44
COL8: D08.2 D18.2 D28.2 D38.2 D48.2 D58.2 RCOL8.2 U1.45
COL9: D09.2 D19.2 D29.2 D39.2 D49.2 D59.2 RCOL9.2 U1.47
COLA: D0A.2 D1A.2 D2A.2 D3A.2 D4A.2 D5A.2 RCOLA.2 U1.48
GND: C1.1 C2.1 C3.1 C4.1 C5.1 C6.2 C7.2 C8.2 C9.1 C10.1 C11.1 C12.1 C13.2 C14.2 C15.2 C16.1 C17.1 C18.1 C19.1 C20.1 C21.1 C22.1 C23.1 C24.1 C25.1 C26.1 C27.1 C28.1 C29.1 C30.1 C31.1 C32.1 C33.1 C34.1 C35.1 C36.1 C37.1 C38.1 C39.1 C40.1 C41.1 C42.1 C43.1 C44.1 C45.1 C46.1 C47.1 C48.1 C49.1 C50.1 C51.1 C52.1 C53.1 C54.1 C55.1 C56.1 C57.1 C58.1 C59.1 C60.1 C61.1 C62.1 C63.1 C64.1 C65.1 C66.1 C67.1 C68.1 C69.1 C70.1 C71.1 C72.1 C73.1 C74.1 C75.1 C76.1 C77.1 C78.1 C79.1 C80.1 C81.1 C82.1 C83.1 C84.1 C85.1 C86.1 C87.1 LED0.2 LED00.2 LED0A.2 LED1.2 LED01.2 LED1A.2 LED02.2 LED2.2 LED2A.2 LED03.2 LED3.2 LED3A.2 LED4A.2 LED5A.2 LED07.2 LED7.2 LED08.2 LED8.2 LED09.2 LED9.2 LED10.2 LED11.2 LED12.2 LED13.2 LED14.2 LED15.2 LED16.2 LED17.2 LED18.2 LED19.2 LED20.2 LED21.2 LED22.2 LED23.2 LED24.2 LED25.2 LED26.2 LED27.2 LED28.2 LED29.2 LED30.2 LED31.2 LED32.2 LED33.2 LED34.2 LED35.2 LED36.2 LED37.2 LED38.2 LED39.2 LED40.2 LED41.2 LED42.2 LED43.2 LED44.2 LED45.2 LED46.2 LED47.2 LED48.2 LED49.2 LED50.2 LED51.2 LED52.2 LED53.2 LED54.2 LED55.2 LED56.2 LED57.2 LED58.2 LED59.2 LEDA.2 MD.1 P1.1 RCOL0.1 RCOL1.1 RCOL2.1 RCOL3.1 RCOL4.1 RCOL5.1 RCOL6.1 RCOL7.1 RCOL8.1 RCOL9.1 RCOLA.1 RST.1 TRACK_BALL1.7 U1.57 U2.4 UART/I1.4 UFL.2 USB1.5
INT: TRACK_BALL1.3 U1.19
LNA_IN: C14.1 L1.2 U1.1
MISO: TRACK_BALL1.4 U1.18
MOSI: TRACK_BALL1.5 U1.16
NCS: TRACK_BALL1.2 U1.15
NetC1_2: C1.2 U1.53 XT1.2
NetC6_1: C6.1 U1.54 XT1.1
NetC7_1: C7.1 R1.2 RST.2 U1.4
NetC13_1: C13.1 L1.1 R3.2
NetD00_1: D00.1 SW00.2
NetD0A_1: D0A.1 SW0A.2
NetD01_1: D01.1 SW01.2
NetD1A_1: D1A.1 SW1A.2
NetD02_1: D02.1 SW02.2
NetD2A_1: D2A.1 SW2A.2
NetD03_1: D03.1 SW03.2
NetD3A_1: D3A.1 SW3A.2
NetD4A_1: D4A.1 SW4A.2
NetD5A_1: D5A.1 SW5A.2
NetD07_1: D07.1 SW07.2
NetD08_1: D08.1 SW08.2
NetD09_1: D09.1 SW09.2
NetD10_1: D10.1 SW10.2
NetD11_1: D11.1 SW11.2
NetD12_1: D12.1 SW12.2
NetD13_1: D13.1 SW13.2
NetD14_1: D14.1 SW14.2
NetD15_1: D15.1 SW15.2
NetD16_1: D16.1 SW16.2
NetD17_1: D17.1 SW17.2
NetD18_1: D18.1 SW18.2
NetD19_1: D19.1 SW19.2
NetD20_1: D20.1 SW20.2
NetD21_1: D21.1 SW21.2
NetD22_1: D22.1 SW22.2
NetD23_1: D23.1 SW23.2
NetD24_1: D24.1 SW24.2
NetD25_1: D25.1 SW25.2
NetD26_1: D26.1 SW26.2
NetD27_1: D27.1 SW27.2
NetD28_1: D28.1 SW28.2
NetD29_1: D29.1 SW29.2
NetD30_1: D30.1 SW30.2
NetD31_1: D31.1 SW31.2
NetD32_1: D32.1 SW32.2
NetD33_1: D33.1 SW33.2
NetD34_1: D34.1 SW34.2
NetD35_1: D35.1 SW35.2
NetD36_1: D36.1 SW36.2
NetD37_1: D37.1 SW37.2
NetD38_1: D38.1 SW38.2
NetD39_1: D39.1 SW39.2
NetD40_1: D40.1 SW40.2
NetD41_1: D41.1 SW41.2
NetD42_1: D42.1 SW42.2
NetD43_1: D43.1 SW43.2
NetD44_1: D44.1 SW44.2
NetD45_1: D45.1 SW45.2
NetD46_1: D46.1 SW46.2
NetD47_1: D47.1 SW47.2
NetD48_1: D48.1 SW48.2
NetD49_1: D49.1 SW49.2
NetD50_1: D50.1 SW50.2
NetD51_1: D51.1 SW51.2
NetD52_1: D52.1 SW52.2
NetD53_1: D53.1 SW53.2
NetD54_1: D54.1 SW54.2
NetD55_1: D55.1 SW55.2
NetD56_1: D56.1 SW56.2
NetD57_1: D57.1 SW57.2
NetD58_1: D58.1 SW58.2
NetD59_1: D59.1 SW59.2
NetLED0_1: LED0.1 LED00.3
NetLED00_1: LED00.1 LED01.3
NetLED0_3: LED0.3 LED1.1
NetLED0A_1: LED0A.1 LED1A.3
NetLED0A_3: LED0A.3 LED09.1
NetLED01_1: LED01.1 LED02.3
NetLED1_3: LED1.3 LED2.1
NetLED1A_1: LED1A.1 LED19.3
NetLED02_1: LED02.1 LED03.3
NetLED2_3: LED2.3 LED3.1
NetLED2A_1: LED2A.1 LED3A.3
NetLED2A_3: LED2A.3 LED29.1
NetLED03_1: LED03.1 LED07.3
NetLED3_3: LED3.3 LED7.1
NetLED3A_1: LED3A.1 LED39.3
NetLED4A_1: LED4A.1 LED5A.3
NetLED4A_3: LED4A.3 LED49.1
NetLED5A_1: LED5A.1 LED59.3
NetLED07_1: LED07.1 LED08.3
NetLED7_3: LED7.3 LED8.1
NetLED08_1: LED08.1 LED09.3
NetLED8_3: LED8.3 LED9.1
NetLED9_3: LED9.3 LEDA.1
NetLED10_1: LED10.1 LED20.3
NetLED10_3: LED10.3 LED11.1
NetLED11_3: LED11.3 LED12.1
NetLED12_3: LED12.3 LED13.1
NetLED13_3: LED13.3 LED14.1
NetLED14_3: LED14.3 LED15.1
NetLED15_3: LED15.3 LED16.1
NetLED16_3: LED16.3 LED17.1
NetLED17_3: LED17.3 LED18.1
NetLED18_3: LED18.3 LED19.1
NetLED20_1: LED20.1 LED21.3
NetLED21_1: LED21.1 LED22.3
NetLED22_1: LED22.1 LED23.3
NetLED23_1: LED23.1 LED24.3
NetLED24_1: LED24.1 LED25.3
NetLED25_1: LED25.1 LED26.3
NetLED26_1: LED26.1 LED27.3
NetLED27_1: LED27.1 LED28.3
NetLED28_1: LED28.1 LED29.3
NetLED30_1: LED30.1 LED40.3
NetLED30_3: LED30.3 LED31.1
NetLED31_3: LED31.3 LED32.1
NetLED32_3: LED32.3 LED33.1
NetLED33_3: LED33.3 LED34.1
NetLED34_3: LED34.3 LED35.1
NetLED35_3: LED35.3 LED36.1
NetLED36_3: LED36.3 LED37.1
NetLED37_3: LED37.3 LED38.1
NetLED38_3: LED38.3 LED39.1
NetLED40_1: LED40.1 LED41.3
NetLED41_1: LED41.1 LED42.3
NetLED42_1: LED42.1 LED43.3
NetLED43_1: LED43.1 LED44.3
NetLED44_1: LED44.1 LED45.3
NetLED45_1: LED45.1 LED46.3
NetLED46_1: LED46.1 LED47.3
NetLED47_1: LED47.1 LED48.3
NetLED48_1: LED48.1 LED49.3
NetLED50_3: LED50.3 LED51.1
NetLED51_3: LED51.3 LED52.1
NetLED52_3: LED52.3 LED53.1
NetLED53_3: LED53.3 LED54.1
NetLED54_3: LED54.3 LED55.1
NetLED55_3: LED55.3 LED56.1
NetLED56_3: LED56.3 LED57.1
NetLED57_3: LED57.3 LED58.1
NetLED58_3: LED58.3 LED59.1
NetMD_2: MD.2 R2.2 U1.5
NetR3_1: R3.1 UFL.1
RGB: LEDA.3 U1.37
ROW0: SW00.1 SW0A.1 SW01.1 SW02.1 SW03.1 SW07.1 SW08.1 SW09.1 U1.6
ROW1: SW1A.1 SW10.1 SW11.1 SW12.1 SW13.1 SW14.1 SW15.1 SW16.1 SW17.1 SW18.1 SW19.1 U1.7
ROW2: SW2A.1 SW20.1 SW21.1 SW22.1 SW23.1 SW24.1 SW25.1 SW26.1 SW27.1 SW28.1 SW29.1 U1.10
ROW3: SW3A.1 SW30.1 SW31.1 SW32.1 SW33.1 SW34.1 SW35.1 SW36.1 SW37.1 SW38.1 SW39.1 U1.11
ROW4: SW4A.1 SW40.1 SW41.1 SW42.1 SW43.1 SW44.1 SW45.1 SW46.1 SW47.1 SW48.1 SW49.1 U1.12
ROW5: SW5A.1 SW50.1 SW51.1 SW52.1 SW53.1 SW54.1 SW55.1 SW56.1 SW57.1 SW58.1 SW59.1 U1.13
SCL_RX: U1.50 UART/I1.3
SCLK: TRACK_BALL1.6 U1.17
SDA_TX: U1.49 UART/I1.2
SPICLK: U1.33 U2.6
SPICS0: U1.32 U2.1
SPID: U1.35 U2.5
SPIHD: U1.30 U2.7
SPIQ: U1.34 U2.2
SPIWP: U1.31 U2.3
USB_DM: U1.25 USB1.2
USB_DP: U1.26 USB1.3
VDD_SPI: C8.1 C15.1 U1.29 U2.8
pads on no net: LED50.1 MD.0 RST.0 U1.8 U1.28 U1.36 U1.38 U1.39 U1.40 U1.41 U1.42 U1.51 U1.52 UFL.3
copper on no net:
  other v1: 94.5,100 105.5,100 110.5,100 121.5,100 126.5,100 137.5,100 142.5,100 153.5,100 206.5,100 217.5,100 222.5,100 233.5,100 238.5,100 249.5,100 254.5,100 265.5,100 94.5,116 105.5,116 110.5,116 121.5,116 126.5,116 137.5,116 142.5,116 153.5,116 158.5,116 169.5,116 174.5,116 185.5,116 190.5,116 201.5,116 206.5,116 217.5,116 222.5,116 233.5,116 238.5,116 249.5,116 254.5,116 265.5,116 94.5,132 105.5,132 110.5,132 121.5,132 126.5,132 137.5,132 142.5,132 153.5,132 158.5,132 169.5,132 174.5,132 185.5,132 190.5,132 201.5,132 206.5,132 217.5,132 222.5,132 233.5,132 238.5,132 249.5,132 254.5,132 265.5,132 94.5,148 105.5,148 110.5,148 121.5,148 126.5,148 137.5,148 142.5,148 153.5,148 158.5,148 169.5,148 174.5,148 185.5,148 190.5,148 201.5,148 206.5,148 217.5,148 222.5,148 233.5,148 238.5,148 249.5,148 254.5,148 265.5,148 94.5,164 105.5,164 110.5,164 121.5,164 126.5,164 137.5,164 142.5,164 153.5,164 158.5,164 169.5,164 174.5,164 185.5,164 190.5,164 201.5,164 206.5,164 217.5,164 222.5,164 233.5,164 238.5,164 249.5,164 254.5,164 265.5,164 94.5,180 105.5,180 110.5,180 121.5,180 126.5,180 137.5,180 142.5,180 153.5,180 158.5,180 169.5,180 174.5,180 185.5,180 190.5,180 201.5,180 206.5,180 217.5,180 222.5,180 233.5,180 238.5,180 249.5,180 254.5,180 265.5,180
  other v2: 100,100 116,100 132,100 148,100 212,100 228,100 244,100 260,100 100,116 116,116 132,116 148,116 164,116 180,116 196,116 212,116 228,116 244,116 260,116 100,132 116,132 132,132 148,132 164,132 180,132 196,132 212,132 228,132 244,132 260,132 100,148 116,148 132,148 148,148 164,148 180,148 196,148 212,148 228,148 244,148 260,148 100,164 116,164 132,164 148,164 164,164 180,164 196,164 212,164 228,164 244,164 260,164 100,180 116,180 132,180 148,180 164,180 180,180 196,180 212,180 228,180 244,180 260,180
  other v3: 178.142,64.927 179.842,64.927 184.873,64.927 186.573,64.927

## Silkscreen, mask and mechanical layers (free items; w line width, h text height)
Top Overlay:
  circle w0.254: c272,185 r3.5
  circle w0.254: c272,95 r3.5
  circle w0.254: c88,95 r3.5
  circle w0.254: c88,185 r3.5
Mechanical 1:
  lines w0.2: 165,91.5 156.5,91.5 88,91.5 cw(c88,95) 84.5,95 84.5,185 cw(c88,185) 88,188.5 268.5,188.5 272,188.5 cw(c272,185) 275.5,185 275.5,95 cw(c272,95) 272,91.5 203.5,91.5 195,91.5 ; 168.5,95 168.5,104 ; 172,107.5 188,107.5 ; 191.5,95 191.5,104
  lines w0.254: 165,91.5 ccw(c165,95) 168.5,95 ; 168.5,104 cw(c172,104) 172,107.5 ; 188,107.5 cw(c188,104) 191.5,104 ; 191.5,95 ccw(c195,95) 195,91.5